# Altium PCB COMM_V4.PcbDoc
Units mm, origin at the board's own origin, x right, y up, seen from the top; angles counter-clockwise.
Board outline 93 x 90 mm, 2 copper layers (Top Layer, Bottom Layer); 43 components, 298 nets, 558 pads, 33 vias.
Unrouted connection lines stored in the file: 792.
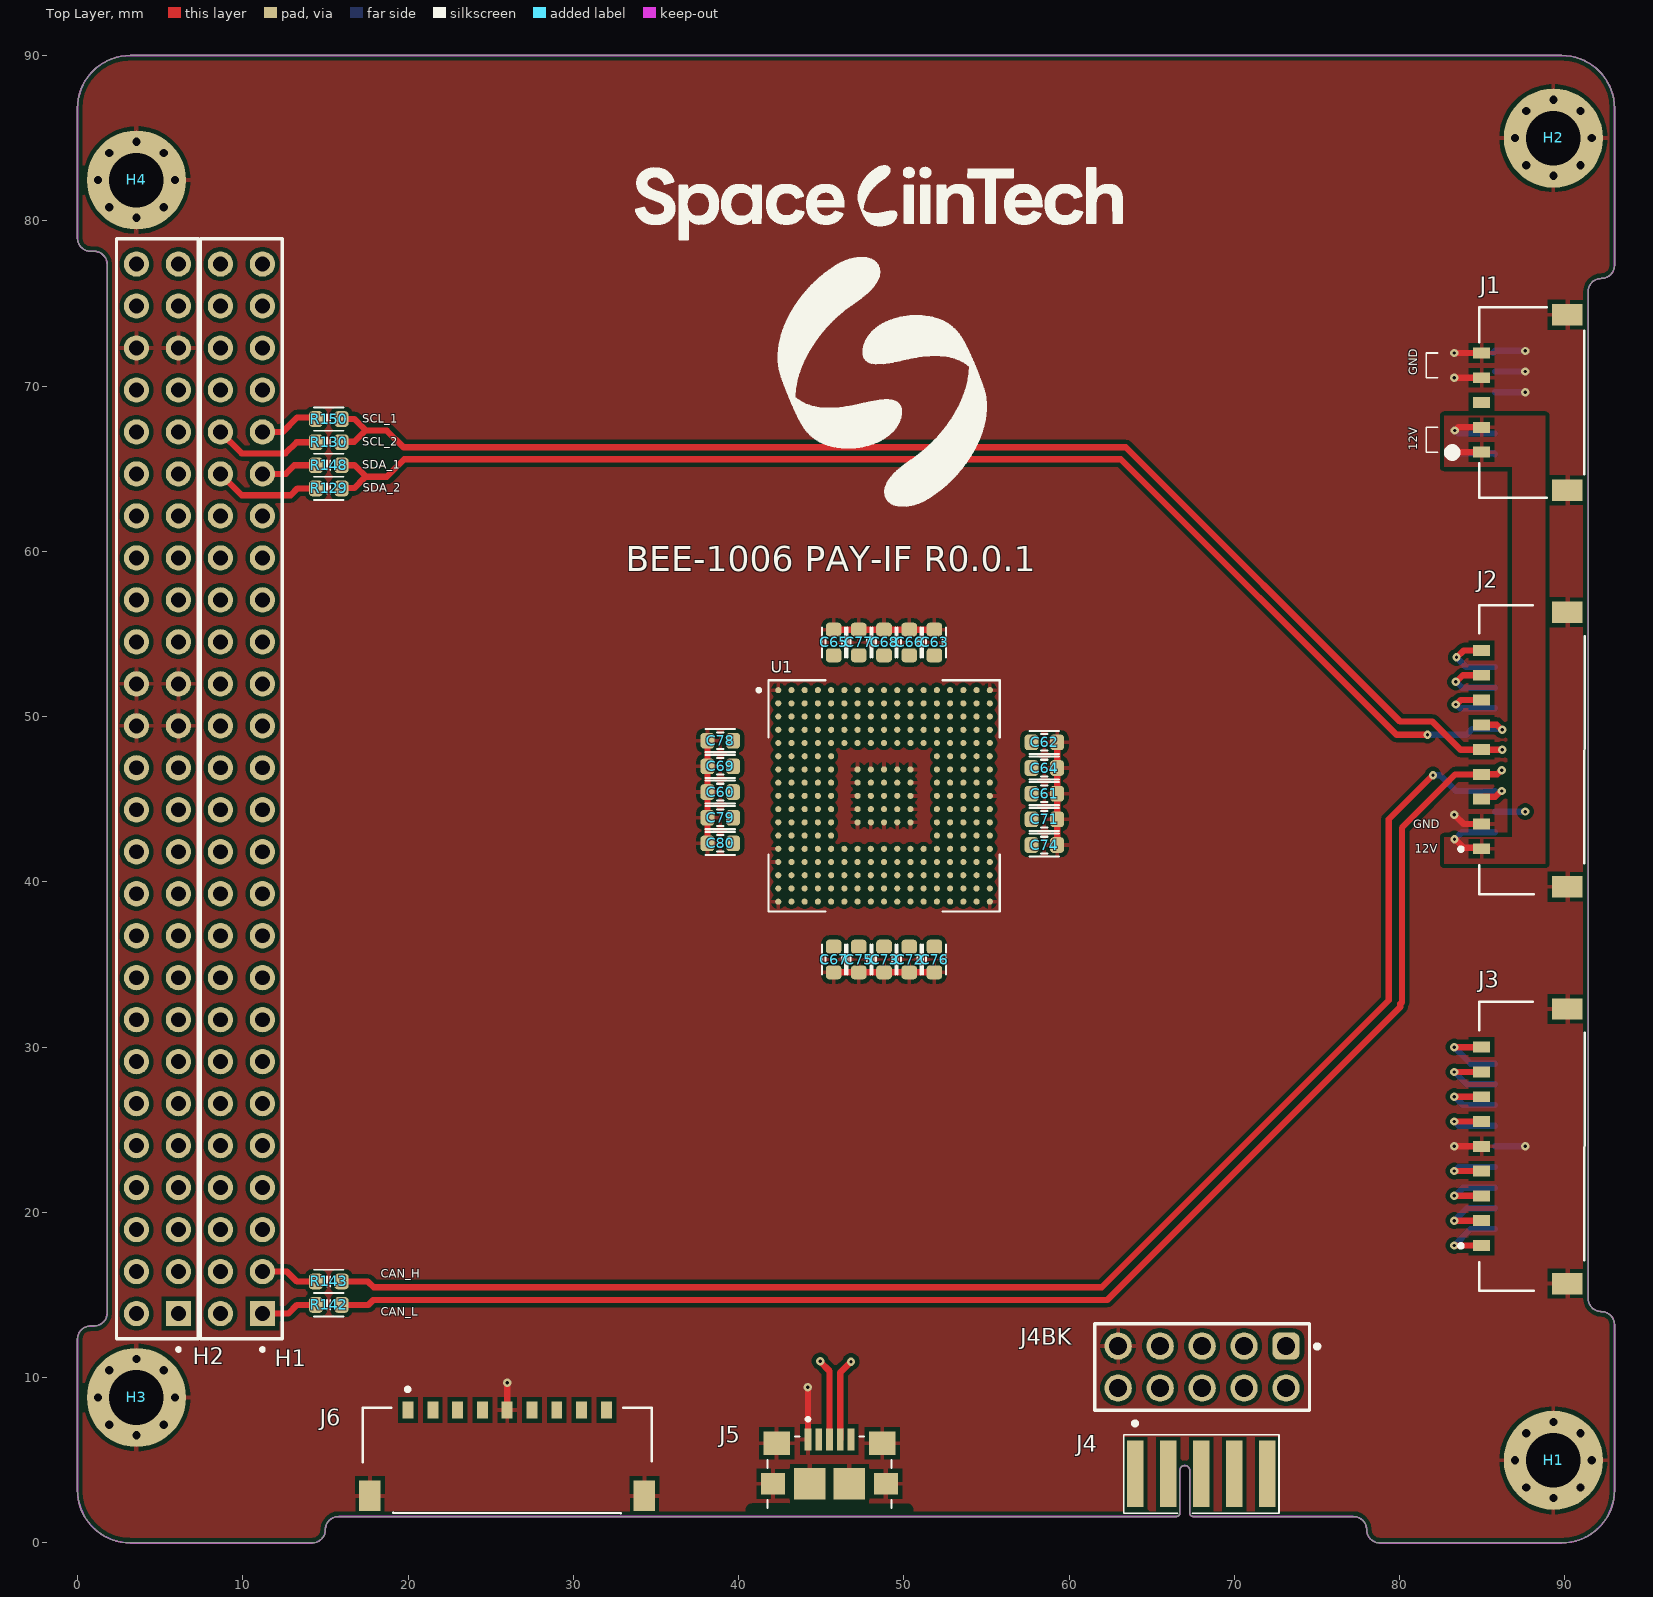
[diagram p0: Top Layer view]
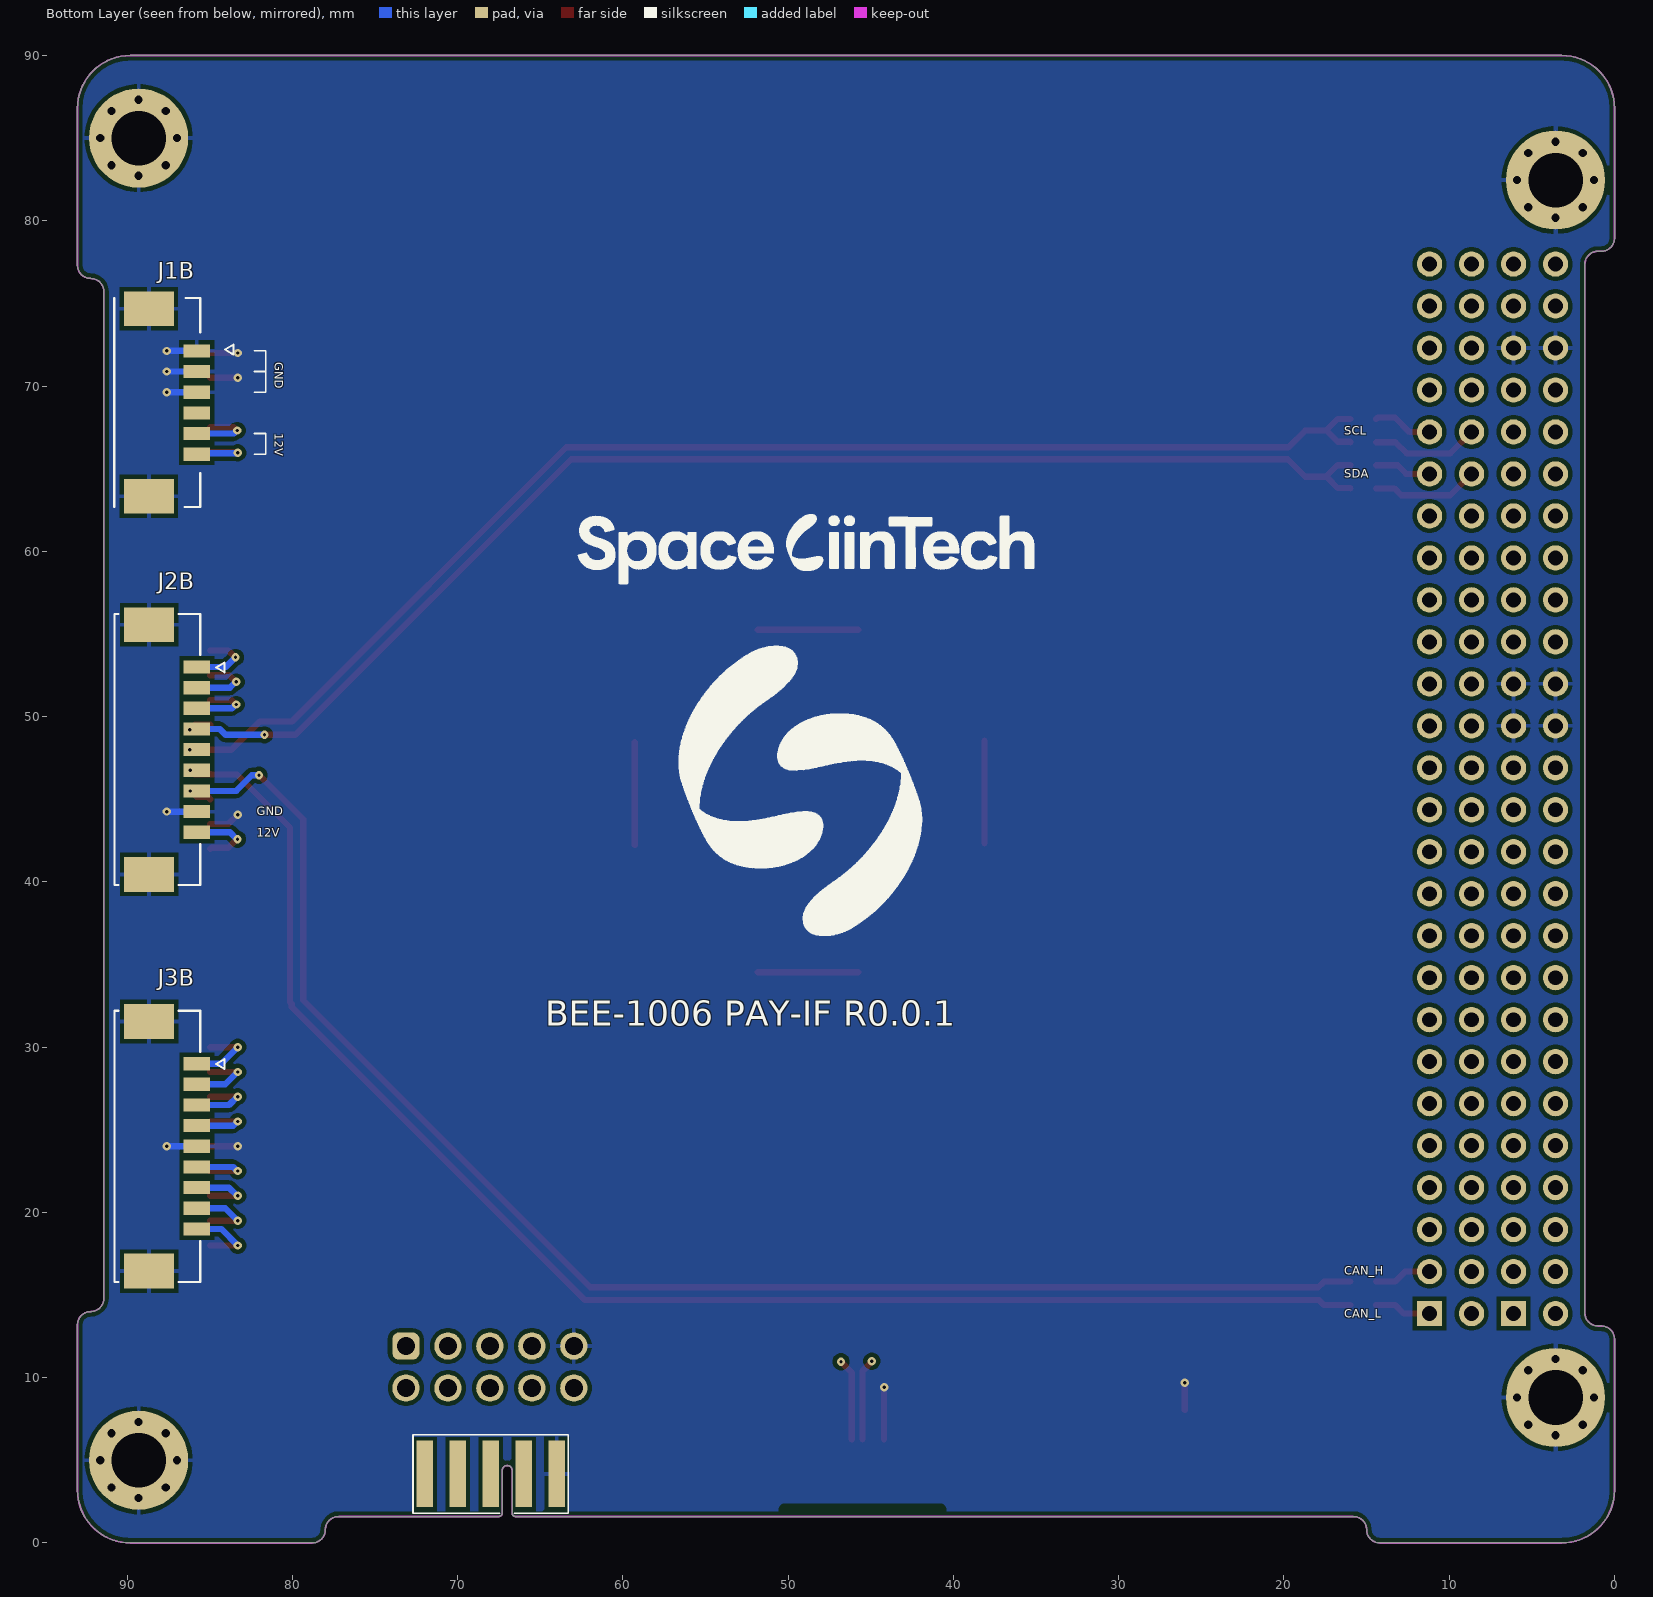
[diagram p1: Bottom Layer view, seen from below]

## Layer stack, top to bottom
Top Solder: solder mask 0.0102, Solder Resist, Dk 3.5
Top Layer: signal copper 0.0356
Dielectric 1: dielectric 0.32, FR-4, Dk 4.8
Bottom Layer: signal copper 0.0356
Bottom Solder: solder mask 0.0102, Solder Resist, Dk 3.5

## Board outline
3.2,0 cw(c3.2,3.2) 0,3.2 0,12.33 cw(c0.8,12.33) 0.8,13.13 1,13.13 ccw(c1,13.93) 1.8,13.93 1.8,77.35 ccw(c1,77.35) 1,78.15 0.8,78.15 cw(c0.8,78.95) 0,78.95 0,86.8 cw(c3.2,86.8) 3.193,90 3.2,90 89.8,90 89.807,90 cw(c89.8,86.8) 93,86.807 93,77.307 cw(c92.2,77.307) 92.2,76.507 ccw(c92.2,75.707) 91.4,75.707 91.4,14.8 ccw(c92.2,14.8) 92.2,14 cw(c92.2,13.2) 93,13.2 93,3.2 cw(c89.8,3.2) 89.8,0 78.8,0 cw(c78.8,0.8) 78,0.8 ccw(c77.2,0.8) 77.2,1.6 67.5,1.6 cw(c67.5,1.8) 67.3,1.8 67.3,4.387 ccw(c67,4.387) 66.7,4.387 66.7,1.8 cw(c66.5,1.8) 66.5,1.6 51,1.6 15.8,1.6 ccw(c15.8,0.8) 15,0.8 cw(c14.2,0.8) 14.2,0

## Design rules (kind name [scope] priority, off if disabled: settings)
Clearance [All vs not OnLayer('Keep-out Layer')] p1: gap=0.254 ignorepadtopadclearanceinfootprint=TRUE
ComponentClearance [All] p1: gap=0 collisioncheckmode=3 verticalgap=0.254 showdistances=FALSE
DiffPairsRouting [All] p1: maxlimit=0.254 minlimit=0.254 mostfreqgap=0.254 toplayer_minwidth=0.381 toplayer_maxwidth=0.381 toplayer_prefwidth=0.381 bottomlayer_minwidth=0.381 bottomlayer_maxwidth=0.381 bottomlayer_prefwidth=0.381 maxuncoupledlength=12.7
HoleSize [All] p1: absolutevalues=TRUE maxlimit=5 minlimit=0.025 maxpercent=80.000 minpercent=20.000
MatchedLengths "Schematic Matched Net Lengths_3" [InNet('SDIO1_CK')] p1: tolerance=2.54 checknetsindiffpair=FALSE checkdiffpairvsdiffpair=TRUE checkxsignals=TRUE checkothers=TRUE
MatchedLengths "Schematic Matched Net Lengths_2" [InNetClass('SDRAM_A[0..11]')] p2: tolerance=2.54 checknetsindiffpair=FALSE checkdiffpairvsdiffpair=TRUE checkxsignals=TRUE checkothers=TRUE
MatchedLengths "Schematic Matched Net Lengths_1" [InNetClass('SDIO1_D[0..7]')] p3: tolerance=2.54 checknetsindiffpair=FALSE checkdiffpairvsdiffpair=TRUE checkxsignals=TRUE checkothers=TRUE
MatchedLengths "Schematic Matched Net Lengths" [InNet('SDIO1_CMD')] p4: tolerance=2.54 checknetsindiffpair=FALSE checkdiffpairvsdiffpair=TRUE checkxsignals=TRUE checkothers=TRUE
MinimumSolderMaskSliver [All] p1: minsoldermaskwidth=0.127
PolygonConnect [All] p1: connectstyle=Relief reliefconductorwidth=0.254 reliefentries=4 polygonreliefangle="90 Angle" airgapwidth=0.254
RoutingVias [All] p1: holewidth=0.2 width=0.5 viastyle="Through Hole" minholewidth=0.2 minwidth=0.5 maxholewidth=0.2 maxwidth=0.5
SilkToSolderMaskClearance [IsPad] p1: minsilkscreentomaskgap=0.127 clearancetoexposedcopper=TRUE
SolderMaskExpansion [All] p1: expansion=0.102 istentingtop=FALSE
Width [All] p1: maxlimit=0.381 minlimit=0.254 preferedwidth=0.254
25 further rules are at their usual default settings.

## Classes and differential pairs
net class ULPI_D[0..7]: ULPI_D0 ULPI_D1 ULPI_D2 ULPI_D3 ULPI_D4 ULPI_D5 ULPI_D6 ULPI_D7
net class SDRAM_D[0..31]: SDRAM_D0 SDRAM_D1 SDRAM_D2 SDRAM_D3 SDRAM_D4 SDRAM_D5 SDRAM_D6 SDRAM_D7 SDRAM_D8 SDRAM_D9 SDRAM_D10 SDRAM_D11 SDRAM_D12 SDRAM_D13 SDRAM_D14 SDRAM_D15 SDRAM_D16 SDRAM_D17 SDRAM_D18 SDRAM_D19 SDRAM_D20 SDRAM_D21 SDRAM_D22 SDRAM_D23 SDRAM_D24 SDRAM_D25 SDRAM_D26 SDRAM_D27 SDRAM_D28 SDRAM_D29 SDRAM_D30 SDRAM_D31
net class SDRAM_A[0..11]: SDRAM_A0 SDRAM_A1 SDRAM_A2 SDRAM_A3 SDRAM_A4 SDRAM_A5 SDRAM_A6 SDRAM_A7 SDRAM_A8 SDRAM_A9 SDRAM_A10 SDRAM_A11
net class SDIO1_D[0..7]: SDIO1_D0 SDIO1_D1 SDIO1_D2 SDIO1_D3 SDIO1_D4 SDIO1_D5 SDIO1_D6 SDIO1_D7
net class N000-2_[0..4]: FPGA_STATUS0 FPGA_STATUS1 FPGA_STATUS2 FPGA_STATUS3 FPGA_STATUS4
net class N000-1_[0..9]: FPGA_D0 FPGA_D1 FPGA_D2 FPGA_D3 FPGA_D4 FPGA_D5 FPGA_D6 FPGA_D7 FPGA_D8 FPGA_D9
component class USB_HS_DEVICE: 5
component class POWER: J1 J1B
component class MCU: U1
component class MCU_POWER: C60 C61 C62 C63 C64 C65 C66 C67 C68 C69 C71 C72 C73 C74 C75 C76 C77 C78 C79 C80
component class LVDS: J3 J3B
component class FPGA: J6
component class DEBUG: J4 J4BK
component class CONNECTOR: H1 H2 H3 H4 J2 J2B R129 R130 R142 R143 R148 R150
differential pair USB_HS: +USB_HS_P -USB_HS_N
differential pair USB_CON: +USB_CON_P -USB_CON_N
differential pair LVDS_TxD: +LVDS_TxD_P -LVDS_TxD_N
differential pair LVDS_TxC: +LVDS_TxC_P -LVDS_TxC_N
differential pair FPGA_TxD: +FPGA_TxD_P -FPGA_TxD_N
differential pair FPGA_TxC: +FPGA_TxC_P -FPGA_TxC_N

## Components (designator, comment, footprint, x,y, rotation, side; value= is the part's Value field where it differs from the comment)
C60 "0.1uF/16V" CAP_C_1608X80 38.894,45.435 r0 top value=33pF
C61 "0.1uF/16V" CAP_C_1608X80 58.5,45.333 r180 top value=33pF
C62 "0.1uF/16V" CAP_C_1608X80 58.5,48.439 r180 top value=33pF
C63 "0.1uF/16V" CAP_C_1608X80 51.848,54.483 r270 top value=33pF
C64 "0.1uF/16V" CAP_C_1608X80 58.5,46.886 r180 top value=33pF
C65 "0.1uF/16V" CAP_C_1608X80 45.752,54.483 r270 top value=33pF
C66 "0.1uF/16V" CAP_C_1608X80 50.324,54.483 r270 top value=33pF
C67 "0.1uF/16V" CAP_C_1608X80 45.752,35.3 r90 top value=33pF
C68 "0.1uF/16V" CAP_C_1608X80 48.8,54.483 r270 top value=33pF
C69 "0.1uF/16V" CAP_C_1608X80 38.894,46.987 r0 top value=33pF
C71 "0.1uF/16V" CAP_C_1608X80 58.5,43.781 r180 top value=33pF
C72 "0.1uF/16V" CAP_C_1608X80 50.324,35.3 r90 top value=33pF
C73 "0.1uF/16V" CAP_C_1608X80 48.8,35.3 r90 top value=33pF
C74 "0.1uF/16V" CAP_C_1608X80 58.5,42.228 r180 top value=33pF
C75 "0.1uF/16V" CAP_C_1608X80 47.276,35.3 r90 top value=33pF
C76 "0.1uF/16V" CAP_C_1608X80 51.848,35.3 r90 top value=33pF
C77 "0.1uF/16V" CAP_C_1608X80 47.276,54.483 r270 top value=33pF
C78 "0.1uF/16V" CAP_C_1608X80 38.894,48.54 r0 top value=33pF
C79 "0.1uF/16V" CAP_C_1608X80 38.894,43.882 r0 top value=33pF
C80 "0.1uF/16V" CAP_C_1608X80 38.894,42.329 r0 top value=33pF
H1 "ESQ-126-14-G-D" SAMTEC_ESQ-126-14-G-D 11.19,13.88 r90 top
H1 "hole_space" HOLE_SPACE 89.3,5 r0 top locked
H2 "ESQ-126-14-G-D" SAMTEC_ESQ-126-14-G-D 6.11,13.88 r90 top
H2 "hole_space" HOLE_SPACE 89.3,85 r0 top locked
H3 "hole_space" HOLE_SPACE 3.57,8.8 r0 top
H4 "hole_space" HOLE_SPACE 3.57,82.46 r0 top locked
J1 "5040500591" CONN_5040500591_MOL 88,69 r270 top locked
J1B "CONN_SMD_06" MOLEX_532610671 88.173,69 r270 bottom
J2 "5040500991" 5040500991 88,48 r270 top locked
J2B "0532610971" 0532610971 88.17,48 r270 bottom
J3 "5040500991" 5040500991 88,24 r270 top locked
J3B "0532610971" 0532610971 88.17,24 r270 bottom
J4 "009159010061911" 009159010061911 68,4.186 r90 top
J4BK "61301021121" 61301021121 68.047,10.643 r180 top
J5 "GMCB05321121BEU" AMPHENOL_GMCB05321121BEU 45.5,3.582 r0 top
J6 "5040500991" 5040500991 26,5 r180 top
R129 "0R" RES_C_1608X60 15.2,63.8 r0 top
R130 "0R" RES_C_1608X60 15.2,66.6 r0 top
R142 "22R" RES_C_1608X60 15.2,14.4 r180 top
R143 "22R" RES_C_1608X60 15.2,15.82 r180 top
R148 "0R" RES_C_1608X60 15.2,65.2 r0 top
R150 "0R" RES_C_1608X60 15.2,68 r0 top
U1 "STM32H745XIH6" BGA265C80P17X17_1400X1400X110N 48.8,45.2 r0 top

## Footprints (in the part's own frame and the unit in brackets; to place one, negate y for a bottom-side part, rotate by r counter-clockwise, add the part's x,y. Pads: shape width x height; smd on the part's side, far side on the other; paste and mask are expansions set on the pad)
0532610971 [mm] "CONN HEADER SMD R/A 9POS 1.25MM"
  rect 0.8x1.6 smd mask+0.076: 1(-5,2.4) 2(-3.75,2.4) 3(-2.5,2.4) 4(-1.25,2.4) 5(0,2.4) 6(1.25,2.4) 7(2.5,2.4) 8(3.75,2.4) 9(5,2.4)
  rect 2.1x3 smd mask+0.076: S1(-7.55,-0.5) S2(7.55,-0.5)
  silkscreen extent -8.2,-2.6 8.2,4.07, body extent -8.2,-2.67 8.2,2.53, height 3.2
5040500991 [mil]
  rect 26x41 smd: 1(236.22,-119.76) 2(177.17,-119.76) 3(118.11,-119.76) 4(59.06,-119.76) 5(0,-119.76) 6(-59.06,-119.76) 7(-118.11,-119.76) 8(-177.17,-119.76) 9(-236.22,-119.76)
  rect 51x73 smd: 10(-326.97,84.57) 10(326.97,84.57)
  silkscreen extent -344,-173 344,126, body extent -354,-129 357,124, height 79
61301021121 [mm] "Pin Header, pitch 2.54 mm, THT, Vertical, dual row, 10p"
  rrect50% 1.65x1.65 hole 1.1: 1(-5.08,-1.27)
  round 1.65 hole 1.1: 2(-5.08,1.27) 3(-2.54,-1.27) 4(-2.54,1.27) 5(0,-1.27) 6(0,1.27) 7(2.54,-1.27) 8(2.54,1.27) 9(5.08,-1.27) 10(5.08,1.27)
  silkscreen extent -7.08,-2.62 6.5,2.62, body extent -6.35,-2.54 6.35,2.54, height 8.59
009159010061911 [mm]
  rect 4x1 smd paste-2539.97: 1(0,4) 2(0,2) 3(0,0) 4(0,-2) 5(0,-4)
  rect 4x1 smd far side paste-2539.97: 6(0,4) 7(0,2) 8(0,0) 9(0,-2) 10(0,-4)
  Keep-Out Layer lines w0.1: -2.386,1.3 0.2,1.3 cw(c0.2,1) 0.2,0.7 -2.386,0.7
  silkscreen extent -2.39,-4.7 3.16,4.7
AMPHENOL_GMCB05321121BEU [mm]
  rect 0.4x1.35 smd: 1(1.3,2.675) 2(0.65,2.675) 3(0,2.675) 4(-0.65,2.675) 5(-1.3,2.675)
  rect 1.45x1.3 smd: SH1(-3.425,0) SH2(3.425,0)
  rect 1.6x1.4 smd: SH3(-3.2,2.45) SH6(3.2,2.45)
  rect 1.9x1.9 smd: SH4(-1.2,0) SH5(1.2,0)
  silkscreen extent -3.75,-1.45 3.75,4, body extent -3.99,-2.57 3.99,2.87, height 2.71
BGA265C80P17X17_1400X1400X110N [mm]
  round 0.37 smd: A1(-6.4,6.4) A2(-5.6,6.4) A3(-4.8,6.4) A4(-4,6.4) A5(-3.2,6.4) A6(-2.4,6.4) A7(-1.6,6.4) A8(-0.8,6.4) A9(0,6.4) A10(0.8,6.4) A11(1.6,6.4) A12(2.4,6.4) A13(3.2,6.4) A14(4,6.4) A15(4.8,6.4) A16(5.6,6.4) A17(6.4,6.4) B1(-6.4,5.6) B2(-5.6,5.6) B3(-4.8,5.6) B4(-4,5.6) B5(-3.2,5.6) B6(-2.4,5.6) B7(-1.6,5.6) B8(-0.8,5.6) B9(0,5.6) B10(0.8,5.6) B11(1.6,5.6) B12(2.4,5.6) B13(3.2,5.6) B14(4,5.6) B15(4.8,5.6) B16(5.6,5.6) B17(6.4,5.6) C1(-6.4,4.8) C2(-5.6,4.8) C3(-4.8,4.8) C4(-4,4.8) C5(-3.2,4.8) C6(-2.4,4.8) C7(-1.6,4.8) C8(-0.8,4.8) C9(0,4.8) C10(0.8,4.8) C11(1.6,4.8) C12(2.4,4.8) C13(3.2,4.8) C14(4,4.8) C15(4.8,4.8) C16(5.6,4.8) C17(6.4,4.8) D1(-6.4,4) D2(-5.6,4) D3(-4.8,4) D4(-4,4) D5(-3.2,4) D6(-2.4,4) D7(-1.6,4) D8(-0.8,4) D9(0,4) D10(0.8,4) D11(1.6,4) D12(2.4,4) D13(3.2,4) D14(4,4) D15(4.8,4) D16(5.6,4) D17(6.4,4) E1(-6.4,3.2) E2(-5.6,3.2) E3(-4.8,3.2) E4(-4,3.2) E5(-3.2,3.2) E6(-2.4,3.2) E7(-1.6,3.2) E8(-0.8,3.2) E9(0,3.2) E10(0.8,3.2) E11(1.6,3.2) E12(2.4,3.2) E13(3.2,3.2) E14(4,3.2) E15(4.8,3.2) E16(5.6,3.2) E17(6.4,3.2) F1(-6.4,2.4) F2(-5.6,2.4) F3(-4.8,2.4) F4(-4,2.4) F5(-3.2,2.4) F13(3.2,2.4) F14(4,2.4) F15(4.8,2.4) F16(5.6,2.4) F17(6.4,2.4) G1(-6.4,1.6) G2(-5.6,1.6) G3(-4.8,1.6) G4(-4,1.6) G5(-3.2,1.6) G7(-1.6,1.6) G8(-0.8,1.6) G9(0,1.6) G10(0.8,1.6) G11(1.6,1.6) G13(3.2,1.6) G14(4,1.6) G15(4.8,1.6) G16(5.6,1.6) G17(6.4,1.6) H1(-6.4,0.8) H2(-5.6,0.8) H3(-4.8,0.8) H4(-4,0.8) H5(-3.2,0.8) H7(-1.6,0.8) H8(-0.8,0.8) H9(0,0.8) H10(0.8,0.8) H11(1.6,0.8) H13(3.2,0.8) H14(4,0.8) H15(4.8,0.8) H16(5.6,0.8) H17(6.4,0.8) J1(-6.4,0) J2(-5.6,0) J3(-4.8,0) J4(-4,0) J5(-3.2,0) J7(-1.6,0) J8(-0.8,0) J9(0,0) J10(0.8,0) J11(1.6,0) J13(3.2,0) J14(4,0) J15(4.8,0) J16(5.6,0) J17(6.4,0) K1(-6.4,-0.8) K2(-5.6,-0.8) K3(-4.8,-0.8) K4(-4,-0.8) K5(-3.2,-0.8) K7(-1.6,-0.8) K8(-0.8,-0.8) K9(0,-0.8) K10(0.8,-0.8) K11(1.6,-0.8) K13(3.2,-0.8) K14(4,-0.8) K15(4.8,-0.8) K16(5.6,-0.8) K17(6.4,-0.8) L1(-6.4,-1.6) L2(-5.6,-1.6) L3(-4.8,-1.6) L4(-4,-1.6) L5(-3.2,-1.6) L7(-1.6,-1.6) L8(-0.8,-1.6) L9(0,-1.6) L10(0.8,-1.6) L11(1.6,-1.6) L13(3.2,-1.6) L14(4,-1.6) L15(4.8,-1.6) L16(5.6,-1.6) L17(6.4,-1.6) M1(-6.4,-2.4) M2(-5.6,-2.4) M3(-4.8,-2.4) M4(-4,-2.4) M5(-3.2,-2.4) M13(3.2,-2.4) M14(4,-2.4) M15(4.8,-2.4) M16(5.6,-2.4) M17(6.4,-2.4) N1(-6.4,-3.2) N2(-5.6,-3.2) N3(-4.8,-3.2) N4(-4,-3.2) N5(-3.2,-3.2) N6(-2.4,-3.2) N7(-1.6,-3.2) N8(-0.8,-3.2) N9(0,-3.2) N10(0.8,-3.2) N11(1.6,-3.2) N12(2.4,-3.2) N13(3.2,-3.2) N14(4,-3.2) N15(4.8,-3.2) N16(5.6,-3.2) N17(6.4,-3.2) P1(-6.4,-4) P2(-5.6,-4) P3(-4.8,-4) P4(-4,-4) P5(-3.2,-4) P6(-2.4,-4) P7(-1.6,-4) P8(-0.8,-4) P9(0,-4) P10(0.8,-4) P11(1.6,-4) P12(2.4,-4) P13(3.2,-4) P14(4,-4) P15(4.8,-4) P16(5.6,-4) P17(6.4,-4) R1(-6.4,-4.8) R2(-5.6,-4.8) R3(-4.8,-4.8) R4(-4,-4.8) R5(-3.2,-4.8) R6(-2.4,-4.8) R7(-1.6,-4.8) R8(-0.8,-4.8) R9(0,-4.8) R10(0.8,-4.8) R11(1.6,-4.8) R12(2.4,-4.8) R13(3.2,-4.8) R14(4,-4.8) R15(4.8,-4.8) R16(5.6,-4.8) R17(6.4,-4.8) T1(-6.4,-5.6) T2(-5.6,-5.6) T3(-4.8,-5.6) T4(-4,-5.6) T5(-3.2,-5.6) T6(-2.4,-5.6) T7(-1.6,-5.6) T8(-0.8,-5.6) T9(0,-5.6) T10(0.8,-5.6) T11(1.6,-5.6) T12(2.4,-5.6) T13(3.2,-5.6) T14(4,-5.6) T15(4.8,-5.6) T16(5.6,-5.6) T17(6.4,-5.6) U1(-6.4,-6.4) U2(-5.6,-6.4) U3(-4.8,-6.4) U4(-4,-6.4) U5(-3.2,-6.4) U6(-2.4,-6.4) U7(-1.6,-6.4) U8(-0.8,-6.4) U9(0,-6.4) U10(0.8,-6.4) U11(1.6,-6.4) U12(2.4,-6.4) U13(3.2,-6.4) U14(4,-6.4) U15(4.8,-6.4) U16(5.6,-6.4) U17(6.4,-6.4)
  silkscreen extent -7.67,-7 7,7, body extent -7,-7 7,7, height 1.1
CAP_C_1608X80 [mm] "Chip Capacitor, 2-Leads, Body 1.60x0.80mm, IPC Medium Density"
  rrect50% 0.85x0.95 smd: 1(-0.775,0) 2(0.775,0)
  silkscreen extent -0.9,-0.7 0.9,0.7, body extent -0.87,-0.48 0.87,0.48, height 0.85
CONN_5040500591_MOL [mil]
  rect 26x41 smd: 1(118.11,-119.76) 2(59.06,-119.76) 3(0,-119.76) 4(-59.06,-119.76) 5(-118.11,-119.76)
  rect 51x73 smd: 6(-208.86,84.57) 6(208.86,84.57)
  silkscreen extent -226,-200 227,125, body extent -237,-134 237,120, height 79
HOLE_SPACE [mm]
  round 1 hole 0.5: 1(-2.325,0) 1(-1.644,-1.644) 1(-1.644,1.644) 1(0,-2.286) 1(0,2.325) 1(1.644,-1.644) 1(1.644,1.644) 1(2.325,0)
  round 6 hole 3.3: 1(0,0)
MOLEX_532610671 [mm]
  rect 0.8x1.6 smd: 1(-3.125,2.4) 2(-1.875,2.4) 3(-0.625,2.4) 4(0.625,2.4) 5(1.875,2.4) 6(3.125,2.4)
  rect 2.1x3 smd: S1(-5.675,-0.5) S2(5.675,-0.5)
  silkscreen extent -6.32,-2.6 6.32,4.6, body extent -6.32,-2.6 6.32,2.6, height 3.43
RES_C_1608X60 [mm] "Chip Resistor, 2-Leads, Body 1.63x0.83mm, IPC High Density"
  rrect50% 0.85x0.95 smd: 1(-0.775,0) 2(0.775,0)
  silkscreen extent -0.9,-0.7 0.9,0.7, body extent -0.87,-0.48 0.87,0.48, height 0.6
SAMTEC_ESQ-126-14-G-D [mm]
  rect 1.53x1.53 hole 0.9: 01(0,0)
  round 1.53 hole 0.9: 02(0,2.54) 03(2.54,0) 04(2.54,2.54) 05(5.08,0) 06(5.08,2.54) 07(7.62,0) 08(7.62,2.54) 09(10.16,0) 10(10.16,2.54) 11(12.7,0) 12(12.7,2.54) 13(15.24,0) 14(15.24,2.54) 15(17.78,0) 16(17.78,2.54) 17(20.32,0) 18(20.32,2.54) 19(22.86,0) 20(22.86,2.54) 21(25.4,0) 22(25.4,2.54) 23(27.94,0) 24(27.94,2.54) 25(30.48,0) 26(30.48,2.54) 27(33.02,0) 28(33.02,2.54) 29(35.56,0) 30(35.56,2.54) 31(38.1,0) 32(38.1,2.54) 33(40.64,0) 34(40.64,2.54) 35(43.18,0) 36(43.18,2.54) 37(45.72,0) 38(45.72,2.54) 39(48.26,0) 40(48.26,2.54) 41(50.8,0) 42(50.8,2.54) 43(53.34,0) 44(53.34,2.54) 45(55.88,0) 46(55.88,2.54) 47(58.42,0) 48(58.42,2.54) 49(60.96,0) 50(60.96,2.54) 51(63.5,0) 52(63.5,2.54)
  silkscreen extent -2.27,-1.2 65.03,3.74, body extent -1.52,-1.27 65.02,3.81, height 11.1

## Part data
C60 C61 C62 C63 C64 C65 C66 C67 C68 C69 C71 C72 C73 C74 C75 C76 C77 C78 C79 C80: library part CAP_SMD, "CAP_Chip"
H1 H2 J1B: Package=None, Availability=Unavailable, Price=None
  H1 H2: MF=Samtec, MP=ESQ-126-14-G-D
  J1B: MP=532610671
J1: "1.50mm Pitch, Pico-Lock PCB Header, Single Row, Right-Angle, Surface Mount, Gold (Au) Plating, Positive Lock, 5 Circuits, Tape and Reel", Manufacturer_Name="Molex Connector Corporation", Copyright="Copyright (C) 2025 Ultra Librarian. All rights reserved.", Manufacturer_Part_Number=5040500591, RefDes=RefDes, Type=Type
J2 J3 J6: "Connector Header Surface Mount, Right Angle 9 position 0.059\" (1.50mm)"
J2B J3B: library part CONN_SMD_09, "CONN HEADER SMD R/A 9POS 1.25MM"
J4: "pads for STLink V3 minie"
J4BK: "WR-PHD Pin Header, THT, Vertical, pitch 2.54mm, 2 Row, 10P", Contact Resistance=20mOhm, Manufacturer="Wurth Elektronik", Operating Temperature Max=105°C, Operating Temperature Min=-40°C, Rated Current=3A, Withstanding Voltage=500V, Working Voltage=250V, Category="Board-to-Board Connectors", ComponentLink1Description="Website Link", ComponentLink1URL=https://www.we-online.com/redexpert/article/61301021121?ad, ComponentLink2Description="Datasheet Link", ComponentLink2URL=https://www.we-online.com/redexpert/spec/61301021121?ad, Gender="Pin Header", Manufacturer Part Number=61301021121, Match Code=WR-PHD, Mount="Through Hole", Number of Pins=10, Number Of Rows=2, Orientation=Vertical, Packaging=Bag, Pitch=2.54mm
J5: "Micro USB 2.0 Type B Receptacle Right Angle SMT, Tape and Reel Packaging", Package=None, Check_prices=https://www.snapeda.com/parts/GMCB05321121BEU/Amphenol/view-part/?ref=eda, MF="Amphenol Commercial Products", MP=GMCB05321121BEU, SnapEDA_Link=https://www.snapeda.com/parts/GMCB05321121BEU/Amphenol/view-part/?ref=snap
R129 R130 R142 R143 R148 R150: library part _RES_B_2, "RES"
U1: "High-performance and DSP with DP-FPU, Arm Cortex-M7 + Cortex-M4 MCU with 2MBytes of Flash memory, 1MB RAM, 480 MHz CPU, Art Accelerator, L1 cache, external memory interface, large set of peripherals, SMPS", Manufacturer_Name=STMicroelectronics, Copyright="Copyright (C) 2025 Ultra Librarian. All rights reserved.", Datasheet=https://www.st.com/resource/en/datasheet/stm32h745zg.pdf, Manufacturer_Part_Number=STM32H745XIH6, RefDes=RefDes, Type=Type

## Via types
v1: diameter 0.5, hole 0.2, Top Layer to Bottom Layer, tented both sides, 33 vias

## Nets (pads, with @x,y where several pads share a name; then routed paths per layer and width w, separated by ;. In a path a pad name is that pad's centre, name@x,y a point inside that pad or via, vN(x,y) a via of type N, cw(c..) or ccw(c..) an arc to the next point about the centre after c; other vN are vias at no path point)
1V8: 
3.3V: 
3V3: C60.2 C61.2 C62.2 C63.2 C64.2 C65.2 C66.2 C67.2 C68.2 C69.2 C71.2 C72.2 C73.2 C74.2 C75.2 C76.2 C77.2 C78.2 C79.2 C80.2 J4.10 J4BK.1 U1.A6 U1.B1 U1.C17 U1.E6 U1.E9 U1.E11 U1.F5 U1.F17 U1.G2 U1.G5 U1.G13 U1.G17 U1.H5 U1.H13 U1.J13 U1.K5 U1.K13 U1.L5 U1.L13 U1.M5 U1.M13 U1.N7 U1.N8 U1.N10 U1.N11 U1.N12 U1.P17 U1.U12
5V: 
12V: 
12V_CONN: J1.1 J1.2 J1B.5 J1B.6 J2.1 J2B.9 | length 12.9
  Top Layer w0.381: v1(83.305,65.959) 83.337,65.959 83.378,66 J1.1 ; v1(83.318,42.581) 83.35,42.581 83.866,42.065 84.893,42.065 J2.1 ; v1(83.335,67.307) 83.367,67.307 83.56,67.5 J1.2
  Bottom Layer w0.381: v1(83.305,65.959) 83.327,65.936 85.712,65.936 J1B.6 ; v1(83.318,42.581) 83.35,42.581 83.77,43 J2B.9 ; v1(83.335,67.307) 83.367,67.307 83.55,67.125 J1B.5
ADC_ILM: 
ADC_TEMP_1: 
ADC_TEMP_2: 
ADC_TEMP_3: 
ADC_TEMP_4: 
ADC_TEMP_5: 
AUXOFF: 
BOOT0: U1.E8
CAN0_H: H1.03 R143.2 | length 3.5
  Top Layer w0.381: H1.03 12.68,16.42 13.28,15.82 R143.2
CAN0_L: H1.01 R142.2 | length 3.5
  Top Layer w0.381: H1.01 12.76,13.88 13.28,14.4 R142.2
CAN_RX: U1.E16
CAN_TX: U1.E17
COMM_I2C4_EN: 
COMM_I2C4_SCL: U1.B5 U1.R16
COMM_I2C4_SDA: U1.C5 U1.R17
DEBUG_UART_RX: J4.8 J4BK.7 U1.N4
DEBUG_UART_TX: J4.7 J4BK.5 U1.N5
eMMC_RSTn: 
FLT#: 
FPGA_D0: U1.N6
FPGA_D1: U1.P6
FPGA_D2: U1.T6
FPGA_D3: U1.U6
FPGA_D4: U1.U7
FPGA_D5: U1.R12
FPGA_D6: U1.N15
FPGA_D7: U1.N14
FPGA_D8: U1.N13
FPGA_D9: U1.M14
FPGA_RefC: U1.E15
FPGA_STATUS0: U1.L14
FPGA_STATUS1: U1.K14
FPGA_STATUS2: U1.D11
FPGA_STATUS3: U1.E10
FPGA_STATUS4: U1.D10
FPGA_TxC: U1.N3
FPGA_TxC_N: J6.7
FPGA_TxC_P: J6.6
FPGA_TxD_N: J6.2
FPGA_TxD_P: J6.1
FRAM_CS: 
FRAM_SPI6_MISO: 
FRAM_SPI6_MOSI: 
FRAM_SPI6_SCK: 
GND: C60.1 C61.1 C62.1 C63.1 C64.1 C65.1 C66.1 C67.1 C68.1 C69.1 C71.1 C72.1 C73.1 C74.1 C75.1 C76.1 C77.1 C78.1 C79.1 C80.1 H1.1 H2.1 H2.29 H2.30 H2.31 H2.32 H2.47 H2.48 H3.1 H4.1 J1.4 J1.5 J1.6 J1B.1 J1B.2 J1B.3 J1B.S1 J1B.S2 J2.2 J2.10 J2B.8 J2B.S1 J2B.S2 J3.5 J3.10 J3B.5 J3B.S1 J3B.S2 J4.6 J4BK.9 J5.5 J5.SH1 J5.SH2 J5.SH3 J5.SH4 J5.SH5 J5.SH6 J6.5 J6.10 U1.A1 U1.A17 U1.B2 U1.B6 U1.C10 U1.C13 U1.C16 U1.F2 U1.G7 U1.G8 U1.G9 U1.G10 U1.G11 U1.G16 U1.H7 U1.H8 U1.H9 U1.H10 U1.H11 U1.J3 U1.J7 U1.J8 U1.J9 U1.J10 U1.J11 U1.J16 U1.J17 U1.K7 U1.K8 U1.K9 U1.K10 U1.K11 U1.K15 U1.L7 U1.L8 U1.L9 U1.L10 U1.L11 U1.L15 U1.M15 U1.N1 U1.N16 U1.P1 U1.R4 U1.R8 U1.T12 U1.U1 U1.U17 | length 45.6
  Top Layer w0.381: J6.5 v1(26,9.7) ; C80.1 C79.1 C60.1 C69.1 C78.1 ; v1(44.179,9.418) 44.2,9.398 J5.5 ; C67.1 C75.1 C73.1 C72.1 C76.1 ; C65.1 C77.1 C68.1 C66.1 C63.1 ; C74.1 C71.1 C61.1 C64.1 C62.1 ; v1(83.3,24) J3.5 ; v1(83.3,70.5) J1.4 ; v1(83.3,72) J1.5 ; v1(83.302,44.065) 83.866,43.5 J2.2
  Bottom Layer w0.381: J1B.1@85.648,72 J1B.1 v1(87.6,72.125) ; J3B.5 v1(87.596,24) ; J2B.8 v1(87.596,44.25) ; J1B.3 v1(87.6,69.625) ; J1B.2 v1(87.6,70.875)
I2C1_SCL: H1.43 R150.1 | length 3.6
  Top Layer w0.381: H1.43 12.411,67.22 13.291,68.1 14.325,68.1 R150.1
I2C1_SDA: H1.41 R148.1 | length 3.4
  Top Layer w0.381: H1.41 12.594,64.68 13.121,65.207 R148.1@14.418,65.207
I2C2_SCL: H1.44 R130.1 | length 6.6
  Top Layer w0.381: H1.44 9.948,65.922 12.58,65.922 13.258,66.6 R130.1
I2C2_SDA: H1.42 R129.1 | length 6.5
  Top Layer w0.381: H1.42 9.936,63.394 12.904,63.394 13.31,63.8 R129.1
JTCK/SWCLK: J4.4 J4BK.6 U1.B14
JTDI: J4.2 J4BK.10 U1.A14
JTDO/SWO: J4.5 J4BK.4 U1.C6
JTMS/SWDIO: J4.3 J4BK.8 U1.C15
K_IN: U1.B10
LED1: 
LED2: 
LVDS_RxC_N: J3.9 J3B.1 | length 4.5
  Top Layer w0.381: v1(83.3,30) J3.9
  Bottom Layer w0.381: v1(83.3,30) 84.3,29 J3B.1
LVDS_RxC_P: J3.8 J3B.2 | length 4.4
  Top Layer w0.381: v1(83.3,28.5) J3.8
  Bottom Layer w0.381: v1(83.3,28.5) 84.05,27.75 J3B.2
LVDS_RxD_N: J3.4 J3B.6 | length 4.2
  Top Layer w0.381: v1(83.3,22.5) J3.4
  Bottom Layer w0.381: v1(83.3,22.5) 83.332,22.5 83.582,22.75 J3B.6
LVDS_RxD_P: J3.3 J3B.7 | length 4.3
  Top Layer w0.381: v1(83.3,21) J3.3
  Bottom Layer w0.381: v1(83.3,21) 83.332,21 83.832,21.5 J3B.7
LVDS_SPI_MOSI: U1.C11
LVDS_SPI_SCK: U1.B9
LVDS_TxC_N: J3.7 J3B.3 | length 4.3
  Top Layer w0.381: v1(83.3,27) J3.7
  Bottom Layer w0.381: v1(83.3,27) 83.332,27 83.832,26.5 J3B.3
LVDS_TxC_P: J3.6 J3B.4 | length 4.2
  Top Layer w0.381: v1(83.3,25.5) J3.6
  Bottom Layer w0.381: v1(83.3,25.5) 83.332,25.5 83.582,25.25 J3B.4
LVDS_TxD_N: J3.2 J3B.8 | length 4.4
  Top Layer w0.381: v1(83.3,19.5) J3.2
  Bottom Layer w0.381: v1(83.3,19.5) 84.05,20.25 J3B.8
LVDS_TxD_P: J3.1 J3B.9 | length 4.5
  Top Layer w0.381: v1(83.3,18) J3.1
  Bottom Layer w0.381: v1(83.3,18) 84.3,19 J3B.9
NetC5_2: 
NetC30_2: 
NetC35_1: 
NetC42_2: 
NetC43_2: 
NetC44_1: 
NetC44_2: 
NetC81_2: U1.E1
NetC83_1: U1.F1
NetC86_2: U1.A7 U1.D17 U1.U11
NetC93_2: U1.L1 U1.M1
NetFB1_1: 
NetFB1_2: J5.1
NetJ2_3: J2.3 J2B.7 R143.1 | length 91
  Top Layer w0.381: R143.1 17.568,15.82 17.919,15.469 61.981,15.469 79.345,32.833 79.345,43.782 v1(82.01,46.447) ; J2.3 85.098,45.14 85.775,45.14 86.136,45.5 v1(86.168,45.5)
  Bottom Layer w0.381: v1@82.042,46.447 82.453,46.447 83.4,45.5 J2B.7
NetJ2_4: J2.4 J2B.6 R142.1 | length 89.9
  Top Layer w0.381: R142.1 17.6,14.4 17.9,14.7 62.3,14.7 80.027,32.427 80.027,32.617 80.134,32.724 80.134,43.264 83.37,46.5 J2.4 ; J2.4@84.971,46.513 85.898,46.513 86.136,46.75 v1(86.168,46.75)
NetJ2_5: J2.5 J2B.5 R130.2 R150.2 | length 80.1
  Top Layer w0.381: R130.2 16.001,66.626 16.748,66.626 17.355,67.233 ; R150.2 16.765,68 17.375,67.39 ; 17.364,67.304 18.714,67.304 19.727,66.29 63.432,66.29 80.022,49.7 81.978,49.7 83.678,48 J2.5 v1(86.2,48)
NetJ2_6: J2.6 J2B.4 R129.2 R148.2 | length 81
  Top Layer w0.381: R129.2 16.001,63.826 16.748,63.826 17.355,64.433 ; R148.2 16.765,65.2 17.375,64.59 ; 17.364,64.504 18.714,64.504 19.777,65.568 63.132,65.568 79.806,48.894 v1(81.682,48.894) ; J2.6 85.868,49.5 86.168,49.2 v1(86.2,49.2)
  Bottom Layer w0.381: v1(81.682,48.894) 84.043,48.894 84.399,49.25 J2B.4 86.15,49.25 v1(86.2,49.2)
NetJ2_9: J2.9 J2B.1 | length 4.3
  Top Layer w0.381: v1(83.436,53.582) 83.448,53.582 83.866,54 J2.9
  Bottom Layer w0.381: v1(83.436,53.582) 84.018,53 J2B.1
NetLED1_1: 
NetLED2_1: 
NetLED3_1: 
NetLED4_1: 
NetLED5_1: 
NetLED6_1: 
NetR9_2: 
NetR10_2: 
NetR11_2: 
NetR12_2: 
NetR13_2: 
NetR14_2: 
NetR15_2: 
NetR16_2: 
NetR20_2: 
NetR21_2: 
NetR22_2: 
NetR23_2: 
NetR24_1: 
NetR25_2: 
NetR26_1: 
NetR27_2: 
NetR28_1: 
NetR29_2: 
NetR30_1: 
NetR31_2: 
NetR32_1: 
NetR33_2: 
NetR34_1: 
NetR35_2: 
NetR36_1: 
NetR37_2: 
NetR38_1: 
NetR39_2: 
NetR40_1: 
NetR41_2: 
NetR42_1: 
NetR43_2: 
NetR44_1: 
NetR45_2: 
NetR46_1: 
NetR47_1: 
NetR48_2: 
NetR49_1: 
NetR50_2: 
NetR51_1: 
NetR52_1: 
NetR53_2: 
NetR54_2: 
NetR55_1: 
NetR56_2: 
NetR57_1: 
NetR58_2: 
NetR59_1: 
NetR60_2: 
NetR61_1: 
NetR62_2: 
NetR63_1: 
NetR64_1: 
NetR65_2: 
NetR66_1: 
NetR67_2: 
NetR68_1: 
NetR69_2: 
NetR70_1: 
NetR71_2: 
NetR72_1: 
NetR73_1: 
NetR74_1: 
NetR75_1: 
NetR76_1: 
NetR77_1: 
NetR78_1: 
NetR81_2: U1.K1
NetR84_2: U1.E7
NetR85_1: 
NetR91_1: 
NetR92_1: 
NetR93_1: 
NetR94_1: 
NetR95_1: 
NetR96_1: 
NetR97_1: 
NetR98_1: 
NetR99_1: 
NetR100_1: 
NetR101_1: 
NetR102_1: 
NetR103_1: 
NetR104_1: 
NetR105_1: 
NetR106_1: 
NetR116_2: 
NetR123_2: 
NetR124_2: 
NetR127_2: 
NetR134_2: 
NetR135_2: 
NetR140_1: 
NetR151_1: 
NetR152_1: 
NetR153_1: 
NetR155_2: 
NetR156_2: 
NetR157_2: 
NetR158_1: 
NetR159_1: 
NetR160_1: 
NetR161_2: 
NetR162_2: 
NetR163_1: 
NetR164_1: 
NetR165_1: 
NetR166_1: 
NetR167_1: 
OSC32_IN: U1.C2
OSC32_OUT: U1.C1
OSC_24M: 
OSCIN: U1.J1
OSCOUT: U1.J2
REFSEL0: 
REFSEL1: 
REFSEL2: 
RESET#: J4.9 J4BK.3
SDIO1_CK: U1.C12
SDIO1_CMD: U1.D12
SDIO1_D0: U1.E13
SDIO1_D1: U1.E14
SDIO1_D2: U1.A13
SDIO1_D3: U1.B13
SDIO1_D4: U1.D5
SDIO1_D5: U1.D4
SDIO1_D6: U1.F14
SDIO1_D7: U1.F13
SDRAM_A0: U1.G4
SDRAM_A1: U1.G3
SDRAM_A2: U1.G1
SDRAM_A3: U1.H4
SDRAM_A4: U1.J5
SDRAM_A5: U1.J4
SDRAM_A6: U1.R7
SDRAM_A7: U1.P7
SDRAM_A8: U1.P8
SDRAM_A9: U1.R9
SDRAM_A10: U1.T8
SDRAM_A11: U1.U8
SDRAM_BA0: U1.H14
SDRAM_BA1: U1.G14
SDRAM_D0: U1.P16
SDRAM_D1: U1.P15
SDRAM_D2: U1.D13
SDRAM_D3: U1.E12
SDRAM_D4: U1.U9
SDRAM_D5: U1.T9
SDRAM_D6: U1.P9
SDRAM_D7: U1.N9
SDRAM_D8: U1.P10
SDRAM_D9: U1.R10
SDRAM_D10: U1.T10
SDRAM_D11: U1.U10
SDRAM_D12: U1.R11
SDRAM_D13: U1.U16
SDRAM_D14: U1.T17
SDRAM_D15: U1.T16
SDRAM_D16: U1.T13
SDRAM_D17: U1.R13
SDRAM_D18: U1.P13
SDRAM_D19: U1.P14
SDRAM_D20: U1.R14
SDRAM_D21: U1.D16
SDRAM_D22: U1.B17
SDRAM_D23: U1.B16
SDRAM_D24: U1.A16
SDRAM_D25: U1.A15
SDRAM_D26: U1.B15
SDRAM_D27: U1.C14
SDRAM_D28: U1.A2
SDRAM_D29: U1.B3
SDRAM_D30: U1.E2
SDRAM_D31: U1.F3
SDRAM_NBL0: U1.C4
SDRAM_NBL1: U1.B4
SDRAM_NBL2: U1.A4
SDRAM_NBL3: U1.A3
SDRAM_SDCKE1: U1.U13
SDRAM_SDCLK: U1.F15
SDRAM_SDNCAS: U1.D6
SDRAM_SDNE1: U1.T11
SDRAM_SDNRAS: U1.T7
SDRAM_SDNWE: U1.P4
ULPI_CK: U1.T3
ULPI_D0: U1.U2
ULPI_D1: U1.U5
ULPI_D2: U1.T5
ULPI_D3: U1.P11
ULPI_D4: U1.P12
ULPI_D5: U1.T14
ULPI_D6: U1.U14
ULPI_D7: U1.A5
ULPI_DIR: U1.F4
ULPI_NXT: U1.M4
ULPI_STP: U1.L2
USB_CON_N: J2.8 J2B.2 | length 4.3
  Top Layer w0.381: v1(83.392,52.1) 83.425,52.1 83.825,52.5 J2.8
  Bottom Layer w0.381: v1(83.392,52.1) 83.425,52.1 83.775,51.75 J2B.2
USB_CON_P: J2.7 J2B.3 | length 4.1
  Top Layer w0.381: v1(83.392,50.733) 83.425,50.733 83.692,51 J2.7
  Bottom Layer w0.381: v1(83.392,50.733) 83.425,50.733 83.649,50.509 J2B.3@85.761,50.509
USB_HS_N: J5.3 | length 5
  Top Layer w0.381: v1(44.937,10.998) 44.937,10.966 45.5,10.403 J5.3
USB_HS_P: J5.2 | length 5
  Top Layer w0.381: J5.2 46.15,10.316 v1(46.8,10.966)
WAKEUP: U1.E3
WD_DONE: 
pads on no net: H1.02 H1.04 H1.05 H1.06 H1.07 H1.08 H1.09 H1.10 H1.11 H1.12 H1.13 H1.14 H1.15 H1.16 H1.17 H1.18 H1.19 H1.20 H1.21 H1.22 H1.23 H1.24 H1.25 H1.26 H1.27 H1.28 H1.29 H1.30 H1.31 H1.32 H1.33 H1.34 H1.35 H1.36 H1.37 H1.38 H1.39 H1.40 H1.45 H1.46 H1.47 H1.48 H1.49 H1.50 H1.51 H1.52 H2.01 H2.02 H2.03 H2.04 H2.05 H2.06 H2.07 H2.08 H2.09 H2.10 H2.11 H2.12 H2.13 H2.14 H2.15 H2.16 H2.17 H2.18 H2.19 H2.20 H2.21 H2.22 H2.23 H2.24 H2.25 H2.26 H2.27 H2.28 H2.33 H2.34 H2.35 H2.36 H2.37 H2.38 H2.39 H2.40 H2.41 H2.42 H2.43 H2.44 H2.45 H2.46 H2.49 H2.50 H2.51 H2.52 J1.3 J1B.4 J4.1 J4BK.2 J5.4 J6.3 J6.4 J6.8 J6.9 U1.A8 U1.A9 U1.A10 U1.A11 U1.A12 U1.B7 U1.B8 U1.B11 U1.B12 U1.C3 U1.C7 U1.C8 U1.C9 U1.D1 U1.D2 U1.D3 U1.D7 U1.D8 U1.D9 U1.D14 U1.D15 U1.E4 U1.E5 U1.F16 U1.G15 U1.H1 U1.H2 U1.H3 U1.H15 U1.H16 U1.H17 U1.J14 U1.J15 U1.K2 U1.K3 U1.K4 U1.K16 U1.K17 U1.L3 U1.L4 U1.L16 U1.L17 U1.M2 U1.M3 U1.M16 U1.M17 U1.N2 U1.N17 U1.P2 U1.P3 U1.P5 U1.R1 U1.R2 U1.R3 U1.R5 U1.R6 U1.R15 U1.T1 U1.T2 U1.T4 U1.T15 U1.U3 U1.U4 U1.U15

## Polygon pours and split planes (outlines as drawn)
GND on Top Layer "GND_L01_P001" (solid, remove dead copper, pour order 1): 3.2,0 14.2,0 ccw(c14.2,0.8) 15,0.8 cw(c15.8,0.8) 15.8,1.6 40,1.6 ccw(c40,2) 40.4,2 cw(c40.8,2) 40.8,2.4 50.2,2.4 cw(c50.2,2) 50.6,2 ccw(c51,2) 51,1.6 66.5,1.6 ccw(c66.5,1.8) 66.7,1.8 66.7,4.387 cw(c67,4.387) 67.3,4.387 67.3,1.8 ccw(c67.5,1.8) 67.5,1.6 77.2,1.6 cw(c77.2,0.8) 78,0.8 ccw(c78.8,0.8) 78.8,0 89.8,0 ccw(c89.8,3.2) 93,3.2 93,13.2 ccw(c92.2,13.2) 92.2,14 cw(c92.2,14.8) 91.4,14.8 91.4,75.707 cw(c92.2,75.707) 92.2,76.507 ccw(c92.2,77.307) 93,77.307 93,86.807 ccw(c89.8,86.8) 89.807,90 89.8,90 3.2,90 3.193,90 ccw(c3.2,86.8) 0,86.8 0,78.95 ccw(c0.8,78.95) 0.8,78.15 1,78.15 cw(c1,77.35) 1.8,77.35 1.8,13.93 cw(c1,13.93) 1,13.13 0.8,13.13 ccw(c0.8,12.33) 0,12.33 0,3.2 ccw(c3.2,3.2)
12V_CONN on Top Layer "12V_CONN_L01_P000" (solid, pour order 0): 82.7,68.2 88.8,68.2 88.8,41.1 82.7,41.1 82.7,42.7 86.8,42.7 86.8,65.1 82.7,65.1
GND on Bottom Layer "GND_L02_P002" (solid, pour order 2): 3.2,0 14.2,0 ccw(c14.2,0.8) 15,0.8 cw(c15.8,0.8) 15.8,1.6 40,1.6 ccw(c40,2) 40.4,2 cw(c40.8,2) 40.8,2.4 50.2,2.4 cw(c50.2,2) 50.6,2 ccw(c51,2) 51,1.6 66.5,1.6 ccw(c66.5,1.8) 66.7,1.8 66.7,4.387 cw(c67,4.387) 67.3,4.387 67.3,1.8 ccw(c67.5,1.8) 67.5,1.6 77.2,1.6 cw(c77.2,0.8) 78,0.8 ccw(c78.8,0.8) 78.8,0 89.8,0 ccw(c89.8,3.2) 93,3.2 93,13.2 ccw(c92.2,13.2) 92.2,14 cw(c92.2,14.8) 91.4,14.8 91.4,75.707 cw(c92.2,75.707) 92.2,76.507 ccw(c92.2,77.307) 93,77.307 93,86.807 ccw(c89.8,86.8) 89.807,90 89.8,90 3.2,90 3.193,90 ccw(c3.2,86.8) 0,86.8 0,78.95 ccw(c0.8,78.95) 0.8,78.15 1,78.15 cw(c1,77.35) 1.8,77.35 1.8,13.93 cw(c1,13.93) 1,13.13 0.8,13.13 ccw(c0.8,12.33) 0,12.33 0,3.2 ccw(c3.2,3.2)

## Keep-outs
Keep-Out Layer:
  lines w0.1: 1.8,77.35 1.8,13.93 cw(c1,13.93) 1,13.13 0.8,13.13 ccw(c0.8,12.33) 0,12.33 0,3.2 ccw(c3.2,3.2) 3.2,0 14.2,0 ccw(c14.2,0.8) 15,0.8 cw(c15.8,0.8) 15.8,1.6 51,1.6 66.5,1.6 ccw(c66.5,1.8) 66.7,1.8 ; 1.8,77.35 ccw(c1,77.35) 1,78.15 0.8,78.15 cw(c0.8,78.95) 0,78.95 0,86.8 cw(c3.2,86.8) 3.193,90 ; 3.2,90 89.8,90 ; 67.3,1.8 ccw(c67.5,1.8) 67.5,1.6 77.2,1.6 cw(c77.2,0.8) 78,0.8 ccw(c78.8,0.8) 78.8,0 89.8,0 ccw(c89.8,3.2) 93,3.2 93,13.2 ccw(c92.2,13.2) 92.2,14 cw(c92.2,14.8) 91.4,14.8 91.4,75.707 cw(c92.2,75.707) 92.2,76.507 ccw(c92.2,77.307) 93,77.307 93,86.807 ccw(c89.8,86.8) 89.807,90

## Silkscreen, mask and mechanical layers (free items; w line width, h text height)
Top Overlay:
  drawing of 24 lines, arcs and shapes, not listed
  text "GND" at 81.05,70.65 h0.5 r90
  text "SCL_1" at 17.22,67.792 h0.5
  text "SCL_2" at 17.22,66.392 h0.5
  text "12V" at 81.05,66.109 h0.5 r90
  text "SDA_1" at 17.22,64.992 h0.5
  text "SDA_2" at 17.25,63.592 h0.5
  text "BEE-1006 PAY-IF R0.0.1" at 33.174,58.796 h1.52
  text "GND" at 80.817,43.25 h0.5
  text "12V" at 80.9,41.75 h0.5
  text "CAN_H" at 18.35,16.053 h0.5
  text "CAN_L" at 18.35,13.733 h0.5
Bottom Overlay:
  drawing of 24 lines, arcs and shapes, not listed
  text "GND" at 81.05,71.45 h0.5 r90
  text "12V" at 81.05,67.15 h0.5 r90
  text "SCL" at 16.35,67.05 h0.5
  text "SDA" at 16.35,64.45 h0.5
  text "GND" at 82.15,44.016 h0.5
  text "12V" at 82.15,42.731 h0.5
  text "BEE-1006 PAY-IF R0.0.1" at 64.7,31.3 h1.52
  text "CAN_H" at 16.35,16.233 h0.5
  text "CAN_L" at 16.35,13.633 h0.5
Top Solder:
  region: 43.754,7.952 47.241,7.952 47.244,7.949 47.244,6.4 43.754,6.4

## Text inside footprints (layer, text, board x,y; h text height)
J5: Mechanical 13 "PCB edge" at 50,2.332 h0.81